# Altium PCB RS485-CAN.PcbDoc
Units mm, origin at the board's own origin, x right, y up, seen from the top; angles counter-clockwise.
Board outline 60.98 x 54.35 mm, 2 copper layers (Top Layer, Bottom Layer); 69 components, 45 nets, 221 pads, 18 vias.
Unrouted connection lines stored in the file: 111.
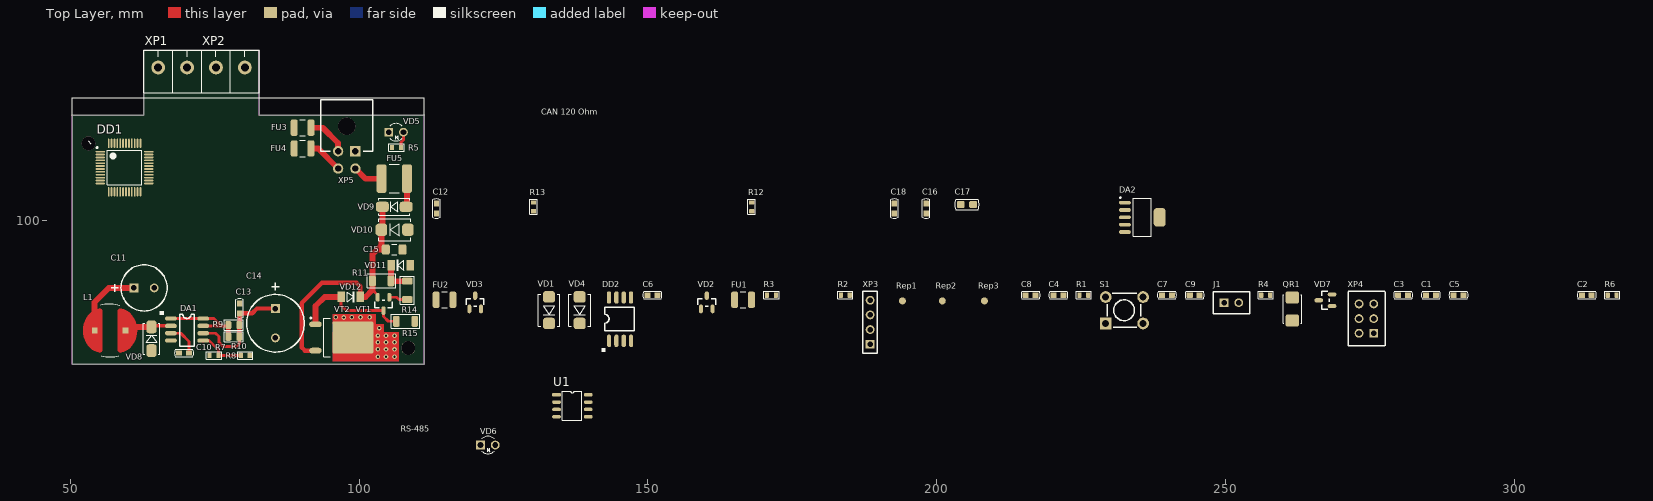
[diagram p0: Top Layer view]
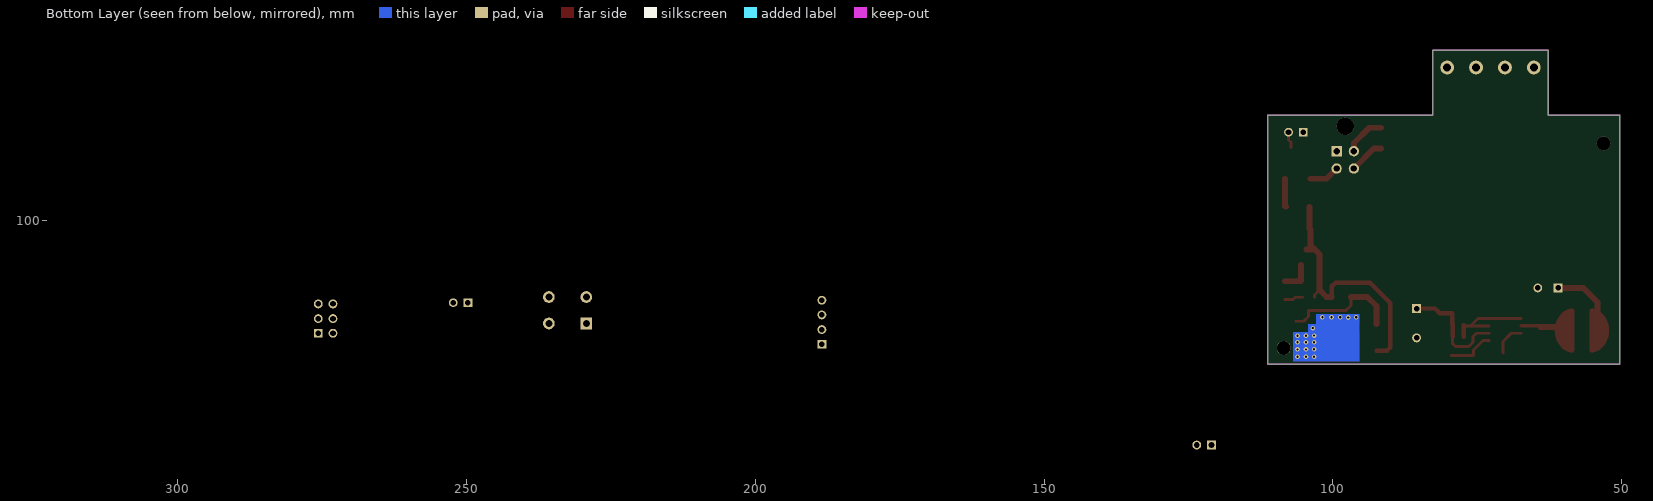
[diagram p1: Bottom Layer view, seen from below]

## Layer stack, top to bottom
Top Solder: solder mask 0.0102, Solder Resist, Dk 3.5
Top Layer: signal copper 0.0356
Dielectric 1: dielectric 0.32, FR-4, Dk 4.8
Bottom Layer: signal copper 0.0356
Bottom Solder: solder mask 0.0102, Solder Resist, Dk 3.5

## Board outline
50.325,75.175 50.325,118.25 50.35,118.275 62.725,118.275 62.725,129.525 82.725,129.525 82.725,118.275 111.275,118.275 111.3,118.25 111.3,75.175

## Design rules (kind name [scope] priority, off if disabled: settings)
Clearance [All] p1: gap=0.2
ComponentClearance [All] p1: gap=0 collisioncheckmode=3 verticalgap=2540 showdistances=FALSE
PolygonConnect [All] p1: connectstyle=Relief reliefconductorwidth=0.254 reliefentries=4 polygonreliefangle="90 Angle" airgapwidth=0.254
RoutingVias [All] p1: holewidth=0.3 width=0.6 viastyle="Through Hole" minholewidth=0.711 minwidth=1.27 maxholewidth=0.711 maxwidth=1.27
SolderMaskExpansion [All] p1: expansion=0.102
Width [All] p1: maxlimit=2 minlimit=0.2 preferedwidth=0.5
29 further rules are at their usual default settings.

## Classes and differential pairs
component class Main: C1 C2 C3 C4 C5 C6 C7 C8 C9 DD1 DD2 FU1 FU2 FU3 FU4 J1 QR1 R1 R2 R3 R4 R5 R6 Rep1 Rep2 Rep3 S1 U1 VD1 VD2 VD3 VD4 VD5 VD6 VD7 XP1 XP2 XP3 XP4
component class Power: C10 C11 C12 C13 C14 C15 C16 C17 C18 DA1 DA2 FU5 L1 R7 R8 R9 R10 R11 R12 R13 R14 R15 VD8 VD9 VD10 VD11 VD12 VT1 VT2 XP5

## Components (designator, comment, footprint, x,y, rotation, side; value= is the part's Value field where it differs from the comment)
C1 "0.1uF" CC0603-3M 285.599,87.1 r0 top
C2 "0.1uF" CC0603-3M 312.599,87.1 r0 top
C3 "0.1uF" CC0603-3M 280.799,87.1 r0 top
C4 "200pF" CC0603-3M 221.1,87.1 r0 top
C5 "0.1uF" CC0603-3M 290.399,87.1 r0 top
C6 "0.1uF" CC0603-3M 150.8,87.1 r0 top
C7 "22pF" CC0603-3M 239.9,87.1 r0 top
C8 "0.1uF" CC0603-3M 216.3,87.1 r0 top
C9 "22pF" CC0603-3M 244.7,87.1 r0 top
C10 "330pFx50V" CC0603-3M 69.7,77.075 r0 top
C11 "1000uFx10V" CC8X3.5 61.025,88.35 r0 top
C12 "1uFx16V" CC0603-3M 113.4,102.1 r90 top
C13 "0.1uFx50V" CC0603-3M 79.325,84.8 r90 top
C14 "470uF" CC16X10_CAP0.5(1)(Primary) 85.525,84.775 r270 top
C15 "0.1uFx250V" CC1206-MIDI 107.525,95 r180 top
C16 "0.1uFx50V" CC0603-3M 198.2,102.1 r90 top
C17 "4.7uFx16V" CC0805-MIDI-2M1 204.2,102.8 r0 top
C18 "1uFx10V" CC0603-3M 192.7,102.1 r90 top
DA1 "MC34063" SO-8 67.425,83.05 r270 top
DA2 "MCP1824T-ADJE/DC" SOT223-6 235.625,100.575 r0 top
DD1 "LPC11C24FBD48" LQFP48 59.4,109.2 r0 top
DD2 "M25P40" EIAJ_SO8 143.3,79.2 r90 top
FU1 "MICROSMD010F-2" RC1210 166.5,86.3 r0 top
FU2 "MICROSMD010F-2" RC1210 114.8,86.3 r0 top
FU3 "MICROSMD010F" RC1210 90.225,116.1 r0 top
FU4 "MICROSMD010F" RC1210 90.225,112.5 r0 top
FU5 "MF-SMDF050" MF-SMDF 106.1,107.275 r0 top
J1 "PLS-02" PIN2W 249.8,85.8 r0 top
L1 "220uH" SDR0805 56.9,80.975 r0 top
QR1 "NX5032GA-12.000MHz LN-CD-1" AC5032_2 261.599,84.7 r90 top
R1 "10k" RC0603-3M 225.5,87.1 r0 top
R2 "10k" RC0603-3M 184.2,87.1 r0 top
R3 "10k" RC0603-3M 171.4,87.1 r0 top
R4 "100E" RC0603-3M 256.999,87.1 r0 top
R5 "330" RC0603-3M 106.5,112.65 r0 top
R6 "330" RC0603-3M 316.999,87.1 r0 top
R7 "3k 1%" RC0603-3M 74.9,76.675 r180 top
R8 "1k 1%" RC0603-3M 80.3,76.675 r180 top
R9 "1E" RC0805_IPC_NOM 78.325,81.925 r180 top
R10 "1E" RC0805_IPC_NOM 78.325,79.9 r180 top
R11 "220k" RC1206-2M 105.525,89.575 r180 top
R12 "105k 1%" RC0603-3M 168,102.4 r90 top
R13 "15k 1%" RC0603-3M 130.2,102.4 r90 top
R14 "220k" RC1206-2M 108.35,86.325 r90 top
R15 "220k" RC1206-2M 106.45,82.575 r0 top
Rep1 "REPER1.2" REPER1.2 194.1,86.1 r90 top
Rep2 "REPER1.2" REPER1.2 201,86.1 r90 top
Rep3 "REPER1.2" REPER1.2 208.3,86.1 r90 top
S1 "SWT-2/5" 7906H-1 229.3,82.2 r0 top
U1 "ST3485EBDR" SO8(3d) 134.2,69.85 r0 top
VD1 "SMBJ5.0A" SMB 132.9,84.5 r90 top
VD2 "BAV99" SOT-23(GSD) 159.2,84.7 r0 top
VD3 "BAV99" SOT-23(GSD) 119.1,84.7 r0 top
VD4 "SMBJ5.0A" SMB 138.2,84.5 r90 top
VD5 "BL-B45V1-L" LED3 105.15,115.325 r0 top
VD6 "GNL-3014GC" LED3 121.05,61.15 r0 top
VD7 "PESD2CAN" SOT-23(123) 268.499,85.2 r0 top
VD8 "SS14" SMA 64.075,79.55 r90 top
VD9 "GS1M" SMA 106.1,102.4 r180 top
VD10 "SMBJ150A" SMB 106.175,98.425 r0 top
VD11 "BZV55C36" SOD-80 107.2,92.275 r0 top
VD12 "BZV55C15" SOD-80 98.55,86.8 r180 top
VT1 "BC856B" SOT-23(123) 105.25,86.75 r90 top
VT2 "IRFR9220" D-PAK(TO-252AA) 96.95,79.775 r0 top
XP1 "DG306-5.0 2PIN" DG306-5.0 65.225,126.525 r0 top
XP2 "DG306-5.0 2PIN" DG306-5.0 75.225,126.525 r0 top
XP3 "PLS04" PIN04S 188.5,78.6 r90 top
XP4 "PLD-06" PIN6 275.699,80.5 r90 top
XP5 "MIF2X02PRP" MIF2X02PRP 99.375,112.025 r90 top

## Footprints (in the part's own frame and the unit in brackets; to place one, negate y for a bottom-side part, rotate by r counter-clockwise, add the part's x,y. Pads: shape width x height; smd on the part's side, far side on the other; paste and mask are expansions set on the pad)
7906H-1 [mil]
  rect 80x80 hole 48: 1(0,0)
  round 80 hole 48: 2(255,0) 3(0,180) 4(255,180)
  silkscreen extent 10,-25 240,205
AC5032_2 [mm]
  rrect30% 2.1x2.3 smd: 1(-2,0) 2(2,0)
  silkscreen extent -2.5,-1.6 2.5,1.6
CC8X3.5 [mil]
  rect 60x60 hole 38: 1(0,0)
  round 60 hole 38: 2(137.8,0)
  silkscreen extent -156,-157 226,157
CC16X10_CAP0.5(1)(Primary) [mil]
  round 60 hole 38: 1(200,0)
  rect 60x60 hole 38: 2(0,0)
  silkscreen extent -175,-197 297,197
CC0603-3M [mil]
  rrect10% 40.98x35.98 smd paste-1000: 1(-33.5,0) 2(33.5,0)
  silkscreen extent -65,-26 65,26
CC0805-MIDI-2M1 [mil]
  rrect50% 54x50 smd: 1(0,0) 2(84,0)
  silkscreen extent -41,-37 125,37
CC1206-MIDI [mm]
  rrect50% 1.4x1.8 smd: 1(0,0) 2(2.9,0)
  silkscreen extent 1,-0.9 1.9,0.9
D-PAK(TO-252AA) [mm]
  oval 2.15x1 smd: 1(-4.5,2.28) 2(-4.5,-2.28)
  rrect10% 7.1x5.55 smd: 3(2,0)
  silkscreen extent -5.42,-3.35 -1.92,3.47
DG306-5.0 [mm]
  round 2.4 hole 1.4: 1(0,0) 2(5,0)
  silkscreen extent -2.5,-4.4 7.5,3, body extent -2.5,-4.4 7.5,3, height 10
EIAJ_SO8 [mil]
  oval 85x29.53 smd: 1(0,0) 2(0,-50) 3(0,-100) 4(0,-150) 5(295,-150) 6(295,-100) 7(295,-50) 8(295,0)
  silkscreen extent -75,-170 230,50
LED3 [mil]
  rect 60x60 hole 39: 1(0,0)
  round 60 hole 39: 2(100,0)
  silkscreen extent 8,-59 92,59
LQFP48 [mm]
  oval 1.6x0.3 smd: 1(-4.2,2.75) 2(-4.2,2.25) 3(-4.2,1.75) 4(-4.2,1.25) 5(-4.2,0.75) 6(-4.2,0.25) 7(-4.2,-0.25) 8(-4.2,-0.75) 9(-4.2,-1.25) 10(-4.2,-1.75) 11(-4.2,-2.25) 12(-4.2,-2.75) 25(4.2,-2.75) 26(4.2,-2.25) 27(4.2,-1.75) 28(4.2,-1.25) 29(4.2,-0.75) 30(4.2,-0.25) 31(4.2,0.25) 32(4.2,0.75) 33(4.2,1.25) 34(4.2,1.75) 35(4.2,2.25) 36(4.2,2.75)
  oval 0.3x1.6 smd: 13(-2.75,-4.2) 14(-2.25,-4.2) 15(-1.75,-4.2) 16(-1.25,-4.2) 17(-0.75,-4.2) 18(-0.25,-4.2) 19(0.25,-4.2) 20(0.75,-4.2) 21(1.25,-4.2) 22(1.75,-4.2) 23(2.25,-4.2) 24(2.75,-4.2) 37(2.75,4.2) 38(2.25,4.2) 39(1.75,4.2) 40(1.25,4.2) 41(0.75,4.2) 42(0.25,4.2) 43(-0.25,4.2) 44(-0.75,4.2) 45(-1.25,4.2) 46(-1.75,4.2) 47(-2.25,4.2) 48(-2.75,4.2)
  silkscreen extent -4.87,-3 3,3.57
MF-SMDF [mm]
  rrect50% 1.8x4.95 smd: 1(-2.2,0) 2(2.2,0)
  silkscreen extent -0.9,-2.45 0.9,2.45
MIF2X02PRP [mm]
  rect 1.8x1.8 hole 1.1: 1(0,0)
  round 1.8 hole 1.1: 2(0,3) 3(-3,0) 4(-3,3)
  round 3 hole 3 unplated: 5(4.32,1.5)
  silkscreen extent 0,-3 8.9,6
PIN2W [mil]
  rect 60x60 hole 38: 1(0,0)
  round 60 hole 38: 2(100,0)
  silkscreen extent -75,-75 175,75
PIN04S [mil]
  rect 60x60 hole 38: 1(0,0)
  round 60 hole 38: 2(100,0) 3(200,0) 4(300,0)
  silkscreen extent -60,-50 360,50
PIN6 [mil]
  rect 60x60 hole 38: 1(0,0)
  round 60 hole 38: 2(0,100) 3(100,0) 4(100,100) 5(200,0) 6(200,100)
  silkscreen extent -85,-77 285,175
RC0603-3M [mm]
  rrect20% 0.71x0.91 smd paste-25.4: 1(-0.775,0) 2(0.775,0)
  silkscreen extent -1.32,-0.65 1.33,0.65
RC0805_IPC_NOM [mm]
  rrect50% 1.05x1.4 smd: 1(-0.95,0) 2(0.95,0)
  silkscreen extent -1.67,-0.89 1.67,0.89
RC1206-2M [mm]
  rrect50% 1.2x1.9 smd: 1(0,0) 2(3.2,0)
  silkscreen extent -0.84,-1.22 4.06,1.22
RC1210 [mm]
  rrect50% 1.2x2.8 smd: 1(-1.45,0) 2(1.45,0)
  silkscreen extent -0.45,-1.4 0.45,1.4
REPER1.2 [mm]
  round 1.2 smd paste-25.4 mask-25.4: 1(0,0)
  Top Layer pour cut-out: -1.2,-1.2 1.2,-1.2 1.2,1.2 -1.2,1.2
SDR0805 [mm]
  rect 1x1 smd paste-25.4 mask-25.4: 1(-2.667,0) 2(2.667,0)
  Top Layer region: 1.327,-3.319 1.362,-3.503 1.461,-3.66 1.612,-3.771 1.792,-3.818 1.977,-3.797 2.318,-3.69 2.706,-3.535 3.065,-3.321 3.387,-3.053 3.392,-3.047 3.771,-2.627 4.09,-2.16 4.345,-1.654 4.53,-1.119 4.642,-0.565 4.68,0 4.642,0.565 4.53,1.119 4.345,1.654 4.09,2.16 3.771,2.627 3.392,3.047 3.381,3.059 3.063,3.323 2.709,3.534 2.325,3.688 1.996,3.791 1.806,3.813 1.62,3.764 1.465,3.65 1.363,3.488 1.327,3.299
  Top Layer region: -1.327,3.319 -1.362,3.503 -1.461,3.66 -1.612,3.771 -1.792,3.818 -1.977,3.797 -2.318,3.69 -2.706,3.535 -3.065,3.321 -3.387,3.053 -3.392,3.047 -3.771,2.627 -4.09,2.16 -4.345,1.654 -4.53,1.119 -4.642,0.565 -4.68,0 -4.642,-0.565 -4.53,-1.119 -4.345,-1.654 -4.09,-2.16 -3.771,-2.627 -3.392,-3.047 -3.381,-3.059 -3.063,-3.323 -2.709,-3.534 -2.325,-3.688 -1.996,-3.791 -1.806,-3.813 -1.62,-3.764 -1.465,-3.65 -1.363,-3.488 -1.327,-3.299
  silkscreen extent -1.66,-4.57 1.64,4.57
SMA [mm]
  rrect50% 2.2x1.75 smd: 1(-2.05,0) 2(2.05,0)
  silkscreen extent -2.65,-1.45 2.65,1.45
SMB [mm]
  rrect50% 2x2.1 smd: 1(2.3,0) 2(-2.3,0)
  silkscreen extent -2.8,-1.9 2.8,1.9
SO8(3d) [mm]
  rrect50% 1.52x0.6 smd: 1(0,0)
  oval 1.52x0.6 smd: 2(0,-1.27) 3(0,-2.54) 4(0,-3.81) 5(5.48,-3.81) 6(5.48,-2.54) 7(5.48,-1.27) 8(5.48,0)
  silkscreen extent 1,-4.44 4.4,0.64, body extent 0.8,-4.3 4.6,0.5, height 1.75
SO-8 [mil]
  oval 29.53x80 smd: 1(0,0) 2(50,0) 3(100,0) 4(150,0) 5(150,220) 6(100,220) 7(50,220) 8(0,220)
  silkscreen extent -50,-75 190,160
SOD-80 [mm]
  rrect10% 1.3x1.83 smd paste-25.4: 1(1.651,0) 2(-1.651,0)
  silkscreen extent -0.66,-0.91 0.56,0.91
SOT223-6 [mm]
  oval 2.05x0.65 smd: 1(-3,2.54) 2(-3,1.27) 3(-3,0) 4(-3,-1.27) 5(-3,-2.54)
  rrect50% 2.05x3.2 smd: 6(3,0)
  silkscreen extent -3.92,-3.3 1.6,3.52
SOT-23(123) [mil]
  oval 59.06x28.07 smd: 1(-0.5,0) 2(-0.5,80) 3(-91.5,40)
  silkscreen extent -70,-20 -20,100
SOT-23(GSD) [mil]
  oval 28.07x59.06 smd: 1(0,0.5) 2(80,0.5) 3(40,91.5)
  silkscreen extent -20,20 100,70

## Part data
C1 C2 C3 C4 C5 C6 C7 C8 C9 C10 C12 C13 C16 C18: library part CC0603, "CC0603"
C11: library part CAP0.35, "CAP0.35"
C14: library part CAP0.5(1), "CAP0.5(1)"
C15: library part CC1206, "CC1206"
C17: library part CC0805, "CC0805"
DA2: "300 mA, Low Voltage, Low Quiescent Current LDO Regulator, 5-Pin SOT-223, Extended Temperature, Tape and Reel"
DD2: library part S25FL016A0LMFI01, "S25FL016A0LMFI01"
FU1 FU2 FU3 FU4: library part MICROSMD, "MICROSMD"
FU5: library part MF-SMDF, "MF-SMDF"
L1: library part SDR0805, "SDR0805"
QR1: library part AC5032_2, "AC5032/2"
R1 R2 R3 R4 R5 R6 R7 R8 R12 R13: library part RC0603, "RC0603"
R9 R10: library part RC0805, "RC0805"
R11 R14 R15: library part RC1206, "RC1206"
S1: "Switch, Single Pole, Single Throw, Normally Open"
VD1 VD4 VD10: library part SMBJ, "SMBJ"
VD2 VD3: "1.0 Ampere General Purpose Rectifier"
VD5 VD6: library part LED_3, "LED_3"
VD7: "TVS for CAN"
VD8: "Schottky Rectifier"
VD11 VD12: library part BZV55C12, "Zener Voltage Regulator Diode"
VT2: "HEXFET Power MOSFET"
XP4: "PLD06"

## Free pads (board coordinates)
  round 2.4 hole 2.4 paste+0 mask+0.102: 0(53.15,113.375)
  round 2.4 hole 2.4: 0(108.525,77.95)

## Via types
v1: diameter 0.8, hole 0.4, Top Layer to Bottom Layer, 18 vias

## Nets (pads, with @x,y where several pads share a name; then routed paths per layer and width w, separated by ;. In a path a pad name is that pad's centre, name@x,y a point inside that pad or via, vN(x,y) a via of type N, cw(c..) or ccw(c..) an arc to the next point about the centre after c; other vN are vias at no path point)
+5V: C3.1 C11.1 C12.2 C16.1 C17.2 DA2.1 DA2.2 DD1.20 L1.1 R7.2 | length 11.1
  Top Layer w1: 54.2,82.675 54.2,85.875 56.675,88.35 C11.1
A: VD1.1 VD2.1 VD3.1
CAN_CON: DD1.28 R5.1
CANH: DD1.19 FU4.1 VD7.1
CANHF: FU4.2 XP5.4 | length 6.2
  Top Layer w1: FU4.2 92.925,112.5 96.375,109.05 XP5.4
CANL: DD1.18 FU3.1 VD7.2
CANLF: FU3.2 XP5.2 | length 7.2
  Top Layer w1: FU3.2 93.725,116.1 96.375,113.45 XP5.2
GND: C1.2 C2.2 C3.2 C4.1 C5.2 C6.1 C7.1 C8.2 C9.1 C10.1 C11.2 C12.1 C13.2 C14.1 C15.1 C16.2 C17.1 C18.1 DA1.4 DA2.3 DA2.6 DD1.21 DD1.41 DD2.4 J1.2 R8.1 R13.1 R15.2 S1.3 S1.4 U1.5 VD1.2 VD4.1 VD5.1 VD6.1 VD7.3 VD8.1 VD10.1 VD11.1 XP1.2 XP3.2 XP3.3 XP4.5 XP5.1
ISP_START: DD1.4 R2.2 XP3.1
ISP_VAR: DD1.14 R3.2 XP3.4
K: VD2.2 VD3.2 VD4.2
MISO: DD1.26 DD2.2
MOSI: DD1.38 DD2.5
NetC10_2: C10.2 DA1.3 | length 5.7
  Top Layer w0.5: DA1.3 69.115,80.51 70.551,79.074 C10.2
NetC15_2: C15.2 R11.2 VD9.2 VD10.2 VD12.2 VT1.2 VT2.2 | length 44.8
  Top Layer w0.5: 102.325,88.025 103.218,87.131 VT1.2
  Top Layer w0.75: VT2.2 90.63,77.495 90.075,78.05 90.075,85.725 93.6,89.25 99.575,89.25 100.201,88.624 VD12.2
  Top Layer w1: VD12.2 101.1,86.8 102.325,88.025 R11.2 102.325,94.2 103.875,95.75 VD10.2 104.05,98.6 VD9.2 ; 103.125,95 C15.2
NetDA1_1: DA1.1 DA1.7 DA1.8 R9.2 R10.2 | length 15.7
  Top Layer w0.5: DA1.1 DA1.8 74.9,83.05 76.025,81.925 75.88,81.78 ; DA1.7 75.88,81.78 ; R9.2 77.23,81.78 75.88,81.78
  Top Layer w0.75: R10.2 R9.2
NetDA1_2: DA1.2 L1.2 VD8.2 | length 8.2
  Top Layer w0.6: VD8.2 64.255,81.78 DA1.2
  Top Layer w1: L1.2 60.192,81.6 VD8.2
NetDA1_5: DA1.5 R7.1 R8.2 | length 8.2
  Top Layer w0.5: DA1.5@72.95,79.177 DA1.5 74.035,79.24 75.675,77.6 R7.1 R8.2
NetDA2_5: DA2.5 R12.2
NetFU1_1: FU1.1 U1.6 VD2.3
NetFU1_2: FU1.2 XP2.1
NetFU2_1: FU2.1 U1.7 VD3.3
NetFU2_2: FU2.2 XP2.2
NetFU5_2: FU5.2 VD9.1 | length 4.9
  Top Layer w1: VD9.1 108.3,102.55 FU5.2
NetR4_2: R4.2 XP4.2
NetR5_2: R5.2 VD5.2 | length 2.8
  Top Layer w0.5: R5.2 107.275,113.575 107.69,113.99 VD5.2
NetR6_2: R6.2 VD6.2
NetR11_1: R11.1 R14.2 VD11.2 | length 5.5
  Top Layer w1: R11.1@105.524,89.674 VD11.2@105.524,92.3 ; R11.1 105.575,89.525 R14.2
NetR14_1: R14.1 VT1.1 | length 3.3
  Top Layer w0.5: VT1.1 106.513,86.737 106.925,86.325 R14.1
NetR15_1: R15.1 VD12.1 VT1.3 VT2.1 | length 21
  Top Layer w0.5: VD12.1 96.899,85.301 97.774,84.426 VT1.3 104.234,83.391 105.05,82.575 R15.1
  Top Layer w1: VT2.1 92.45,85.2 94.05,86.8 VD12.1
NetU1_1: U1.1
NetU1_2: U1.2 U1.3
NetU1_4: U1.4
RESET: C4.2 DD1.3 J1.1 R1.2 S1.1 S1.2
RS485_CON: DD1.29 R6.1
RXD: DD1.46 XP4.3
SCK: DD1.13 DD2.6
SS: DD1.2 DD2.1
STB: DD1.22 DD1.23
TXD: DD1.47 R4.1
VCC: C1.1 C2.1 C5.1 C6.2 C8.1 C18.2 DA2.4 DD1.8 DD1.17 DD1.44 DD2.3 DD2.7 DD2.8 R1.1 R2.1 R3.1 R12.1 R13.2 U1.8 XP1.1
VIN: FU5.1 XP5.3 | length 5.2
  Top Layer w1: XP5.3 101.125,107.275 FU5.1
VIN_F: C13.1 C14.2 DA1.6 R9.1 R10.1 VT2.3 | length 19.8
  Top Layer w0.5: DA1.6 75.165,80.51 75.75,79.925 75.75,78.95 76.5,78.2 78.775,78.2 79.275,78.7 R10.1
  Top Layer w0.75: R10.1 R9.1 79.325,81.975 C13.1 81.499,83.949 82.325,84.775 C14.2
  other v1: 104.675,76.425 106.15,76.425 103.275,76.45 104.675,77.7 106.15,77.7 103.275,77.725 104.675,78.925 106.15,78.925 103.275,78.95 104.675,80.075 106.15,80.075 103.275,80.1 103.5,81.4 97.375,83.225 95.95,83.25 98.725,83.25 100.25,83.25 101.825,83.25
XTALIN: C7.2 DD1.6 QR1.1
XTALOUT: C9.2 DD1.7 QR1.2
pads on no net: DD1.1 DD1.5 DD1.9 DD1.10 DD1.11 DD1.12 DD1.15 DD1.16 DD1.24 DD1.25 DD1.27 DD1.30 DD1.31 DD1.32 DD1.33 DD1.34 DD1.35 DD1.36 DD1.37 DD1.39 DD1.40 DD1.42 DD1.43 DD1.45 DD1.48 Rep1.1 Rep2.1 Rep3.1 XP4.1 XP4.4 XP4.6 XP5.5

## Keep-outs
Keep-Out Layer:
  lines w0.2: 50.325,118.25 50.325,116.15 50.325,75.175 111.3,75.175 111.3,118.25 111.275,118.275 82.725,118.275 82.725,129.525 62.725,129.525 62.725,118.275 50.35,118.275

## Other copper
Top Layer:
  rectangle net VIN_F: 102.45,80.575 104.325,82.1
  rectangle net VIN_F: 95.4,82.1 102.925,83.8
  rectangle net VIN_F: 95.4,75.65 106.925,80.7
Bottom Layer:
  rectangle net VIN_F: 104.325,75.65 106.925,80.7
  rectangle net VIN_F: 102.175,75.65 104.325,82.1
  rectangle net VIN_F: 102.525,81.875 102.925,83.8
  rectangle net VIN_F: 95.4,75.65 102.525,83.8

## Silkscreen, mask and mechanical layers (free items; w line width, h text height)
Top Overlay:
  lines w0.2: 50.325,118.25 50.325,121.325 111.3,121.325 111.3,118.25 ; 53.125,113.8 53.575,113.35
  text "RS-485" at 82.1,145.3 h1
  text "CAN" at 94.7,145.2 h1
  text "ENABLED" at 81.8,143.9 h1
  text "ENABLED" at 92.7,143.8 h1
  text "CAN 120 Ohm" at 131.525,118.325 h1
  text "RS485 120 Ohm" at 22.5,105 h1
  text "RS-485" at 107.25,63.45 h1

## Dimensions
50.325,75.175 to 111.3,75.175 on Mechanical 1
50.325,75.175 to 50.325,116.15 on Mechanical 1